# Altium PCB ZigBee土壤传感板.PcbDoc
Units mil, origin at the board's own origin, x right, y up, seen from the top; angles counter-clockwise.
Board outline 3878.5 x 3113.5 mil, 2 copper layers (Top Layer, Bottom Layer); 34 components, 27 nets, 139 pads, 24 vias.
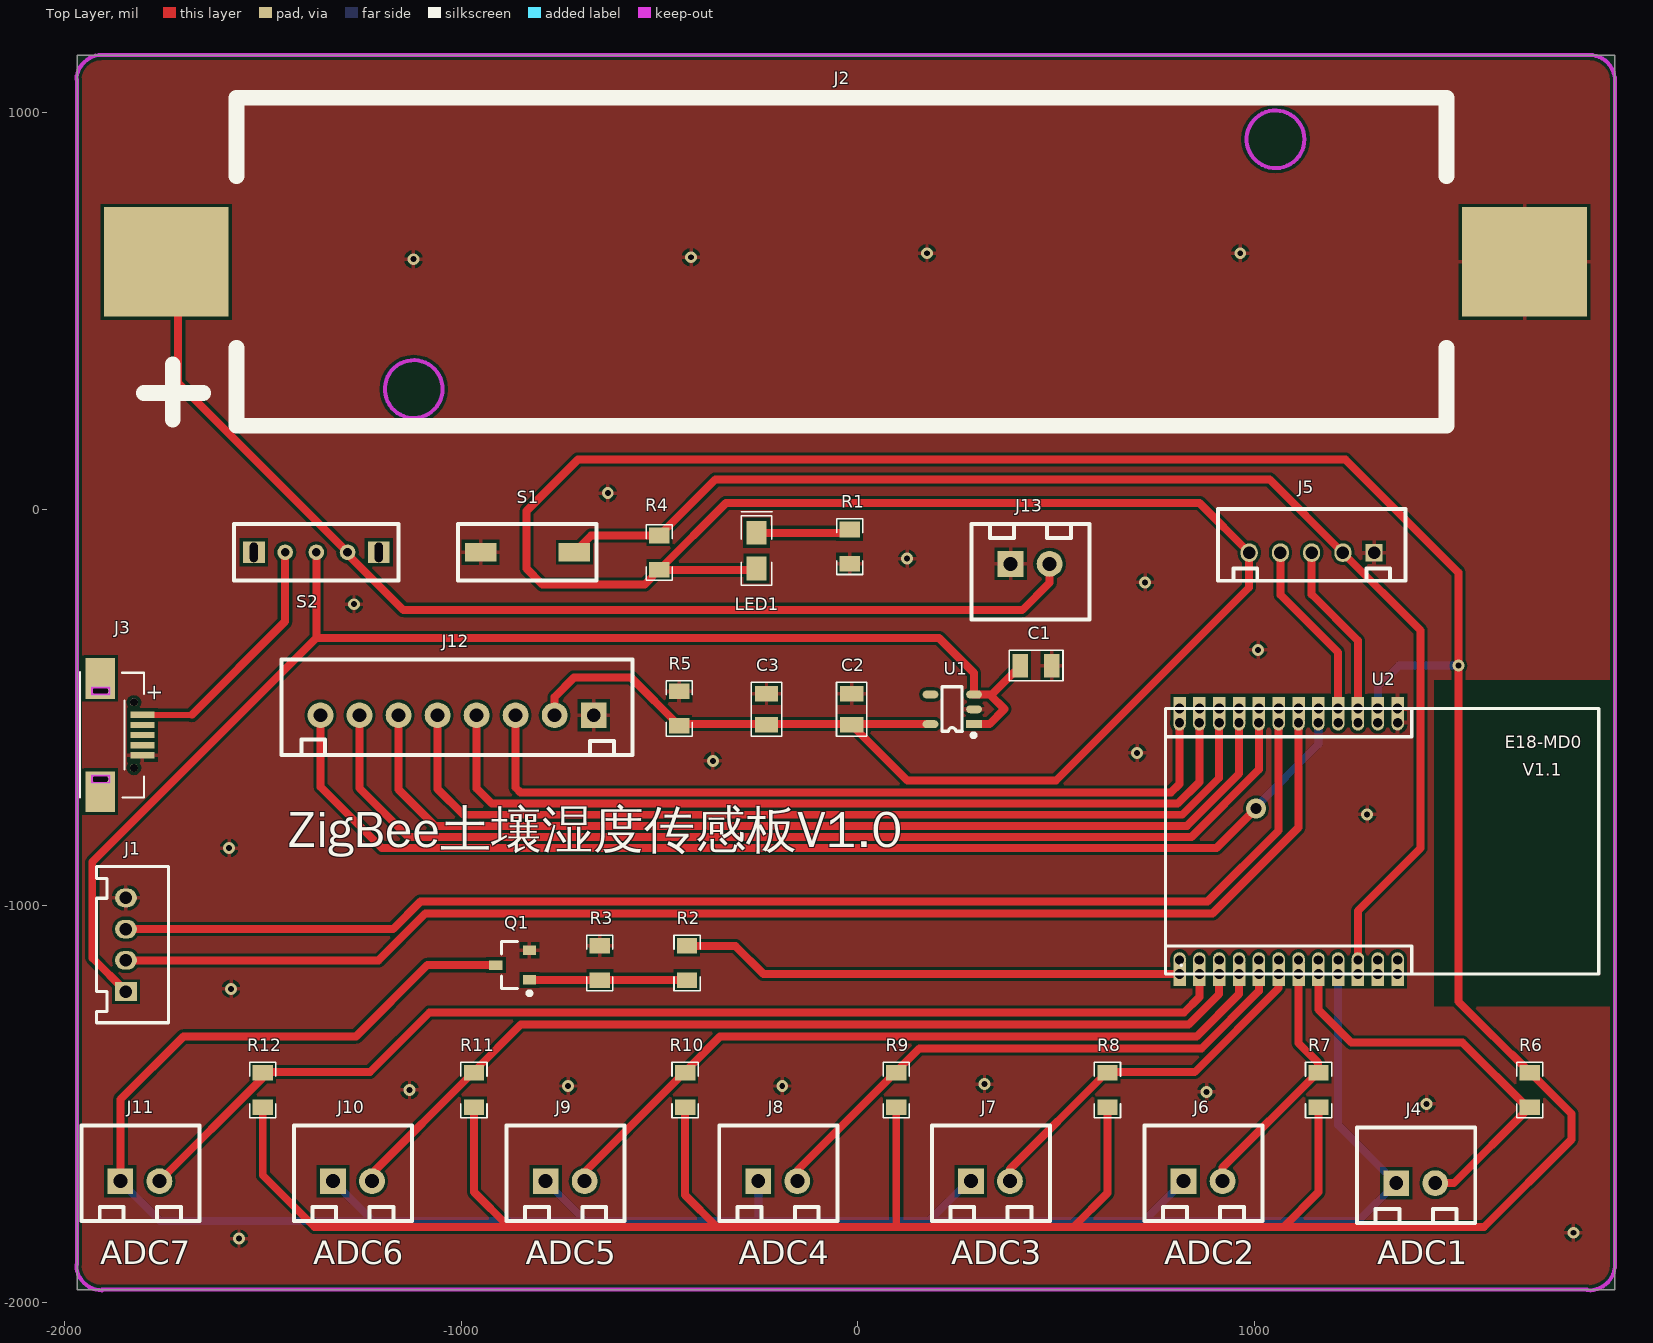
[diagram p0: Top Layer view]
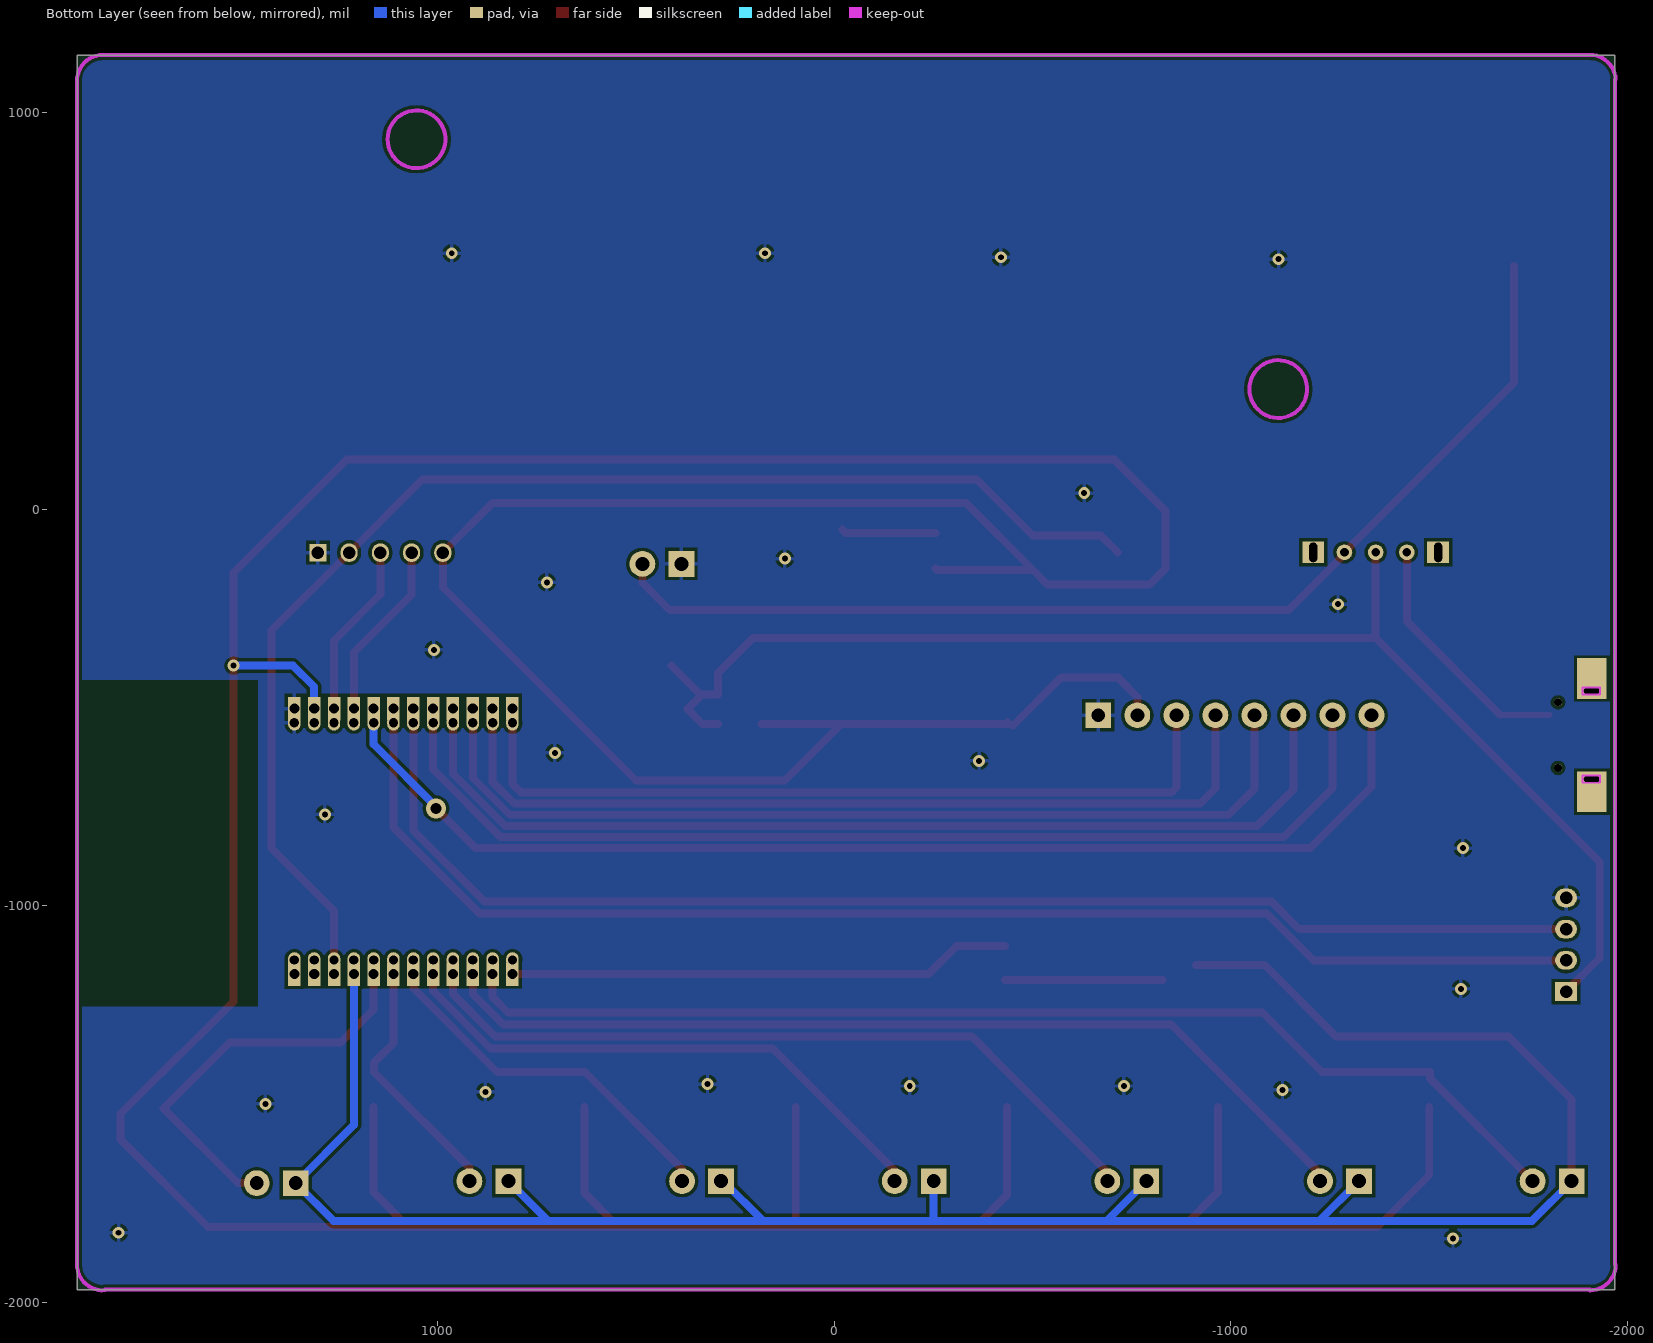
[diagram p1: Bottom Layer view, seen from below]

## Layer stack, top to bottom
Top Layer: signal copper 1.4
Dielectric: dielectric 12.6, FR-4, Dk 4.8
Bottom Layer: signal copper 1.4

## Board outline
-1968.5,-1968.5 -1968.5,1145 1910,1145 1910,-1968.5

## Design rules (kind name [scope] priority, off if disabled: settings)
Clearance [All] p1: gap=8
MinimumSolderMaskSliver [All] p1: minsoldermaskwidth=1
PolygonConnect [All] p1: connectstyle=Relief reliefconductorwidth=10 reliefentries=4 polygonreliefangle="90 Angle"
RoutingVias [All] p1: holewidth=28 width=50 viastyle="Through Hole" minholewidth=28 minwidth=50 maxholewidth=28 maxwidth=50
ShortCircuit [All] p1 off: allowed=FALSE
SilkToSilkClearance [All] p1: silktosilkclearance=8
SilkscreenOverComponentPads [All] p1 off: minsilkscreentomaskgap=5
SolderMaskExpansion [All] p1: expansion=4
Width [All] p1: maxlimit=100 minlimit=5 preferedwidth=10
24 further rules are at their usual default settings.

## Components (designator, comment, footprint, x,y, rotation, side; value= is the part's Value field where it differs from the comment)
C1 "1uF" C0805_M2013 450,-395 r180 top
C2 "10uF" C0805_M2013 -14.81,-505 r90 top
C3 "0.1uF" C0805_M2013 -229.71,-505 r90 top
J1 "PH2.0-4P" PH2.0-4P -1845,-1020 r90 top
J2 "Header 2" 18650 1485,210 r180 top
J3 "micro USB" MICRO-USB -1890,-570 r270 top
J4 "XH-A-2P" XH-A-2P 1407.54,-1700 r0 top
J5 "PH-A-5P" PH-A-5P 1145,-110 r180 top
J6 "XH-A-2P" XH-A-2P 871.28,-1695 r0 top
J7 "XH-A-2P" XH-A-2P 335.03,-1695 r0 top
J8 "XH-A-2P" XH-A-2P -201.23,-1695 r0 top
J9 "XH-A-2P" XH-A-2P -737.49,-1695 r0 top
J10 "XH-A-2P" XH-A-2P -1273.74,-1695 r0 top
J11 "XH-A-2P" XH-A-2P -1810,-1695 r0 top
J12 "PH-A-8P" XH-A-8P -1010,-520 r180 top
J13 "Header 2" XH-A-2P 435,-138.27 r0 top
LED1 "LED-R" 0805_LED -255,-105 r90 top
Q1 "SOT-23" SOT-23-3 -870,-1150 r180 top
R1 "R0805_M2013" R0805_M2013 -20,-95 r270 top
R2 "5.1K" R0805_M2013 -430,-1145 r270 top
R3 "5.1K" R0805_M2013 -650,-1145 r90 top
R4 "R0805_M2013" R0805_M2013 -500,-110 r90 top
R5 "1K" R0805_M2013 -450,-502.91 r270 top
R6 "10K" R0805_M2013 1695,-1465 r270 top
R7 "10K" R0805_M2013 1162.5,-1465 r90 top
R8 "10K" R0805_M2013 630,-1465 r90 top
R9 "10K" R0805_M2013 97.5,-1465 r90 top
R10 "10K" R0805_M2013 -435,-1465 r90 top
R11 "10K" R0805_M2013 -967.5,-1465 r90 top
R12 "10K" R0805_M2013 -1500,-1465 r90 top
S1 "SW-PB" SW-KEY -675,-180 r180 top
S2 "SS12D07" SS-12D07 -1365,-109.13 r180 top
U1 "XC6503D331" SOT23-5 238.74,-505 r180 top
U2 "ZigbeeCC2530Core" CC2530_CORE 1305,-765 r0 top

## Footprints (in the part's own frame and the unit in brackets; to place one, negate y for a bottom-side part, rotate by r counter-clockwise, add the part's x,y. Pads: shape width x height; smd on the part's side, far side on the other; paste and mask are expansions set on the pad)
0805_LED [mil]
  rect 60x50 smd: 1(-45,0) 2(45,0)
  silkscreen extent -88,-39 98,38
18650 [mm] "186"
  rect 8x7 smd: 1(-5,-10.5) 2(82,-10.5)
  Keep-Out Layer circle w0.254: c66.15,-2.35 r1.85
  Keep-Out Layer circle w0.254: c10.95,-18.35 r1.85
  silkscreen extent 0,-21 83.42,0
C0805_M2013 [mm] "Chip Capaci"
  rect 1x1.5 smd: 1(-1,0) 2(1,0)
  silkscreen extent -1.72,-0.97 1.73,0.97
CC2530_CORE [mm]
  oval 0.8x1 hole 0.6: 1(1.445,5.745) 2(0.175,5.745) 3(-1.095,5.745) 4(-2.365,5.745) 5(-3.635,5.745) 6(-4.905,5.745) 7(-6.175,5.745) 8(-7.445,5.745) 9(-8.715,5.745) 10(-9.985,5.745) 11(-11.255,5.745) 12(-12.525,5.745) 13(-12.525,-9.455) 14(-11.255,-9.455) 15(-9.985,-9.455) 16(-8.715,-9.455) 17(-7.445,-9.455) 18(-6.175,-9.455) 19(-4.905,-9.455) 20(-3.635,-9.455) 21(-2.365,-9.455) 22(-1.095,-9.455) 23(0.175,-9.455) 24(1.445,-9.455)
  rect 0.8x1.5 hole 0.65: 1(1.445,6.645) 2(0.175,6.645) 3(-1.095,6.645) 4(-2.365,6.645) 5(-3.635,6.645) 6(-4.905,6.645) 7(-6.175,6.645) 8(-7.445,6.645) 9(-8.715,6.645) 10(-9.985,6.645) 11(-11.255,6.645) 12(-12.525,6.645) 13(-12.525,-10.355) 14(-11.255,-10.355) 15(-9.985,-10.355) 16(-8.715,-10.355) 17(-7.445,-10.355) 18(-6.175,-10.355) 19(-4.905,-10.355) 20(-3.635,-10.355) 21(-2.365,-10.355) 22(-1.095,-10.355) 23(0.175,-10.355) 24(1.445,-10.355)
  Top Layer lines w0.22: -12.409,-9.785 ccw(c-12.409,-9.751) -12.385,-9.775
  silkscreen extent -13.42,-10.35 14.33,6.65
MICRO-USB [mm]
  rect 0.4x1.55 smd: 1(-1.3,2.2) 2(-0.65,2.2) 3(0,2.2) 4(0.65,2.2) 5(1.3,2.2)
  rect 2.6x1.9 hole 0.4 slot 1 at 90 deg copper offset -0.8,0: 6(-2.825,-0.5)
  rect 2.6x1.9 hole 0.4 slot 1 at 90 deg copper offset 0.8,0: 6(2.825,-0.5)
  round 0.5 hole 0.5 unplated: ""(-2.1,1.65) ""(2.1,1.65)
  Keep-Out Layer lines w0.127: 3.054,-1.043 3.054,0.075 2.596,0.075 2.596,-1.043 3.054,-1.043 ; -2.596,-1.043 -2.596,0.075 -3.054,0.075 -3.054,-1.043 -2.596,-1.043
  silkscreen extent -4.05,-1.8 4,2.3
PH2.0-4P [mm]
  rect 1.2x1.4 hole 0.8: 1(-5,0)
  oval 1.2x1.4 hole 0.8: 2(-3,0) 3(-1,0) 4(1,0)
  silkscreen extent -7.01,-2.72 3,1.88
PH-A-5P [mm]
  rect 1.1x1.1 hole 0.8: 1(-4,0)
  oval 1.1x1.2 hole 0.8: 2(-2,0) 3(0,0) 4(2,0) 5(4,0)
  silkscreen extent -6,-2.8 6,1.8
R0805_M2013 [mm]
  rect 1x1.3 smd: 1(-1.1,0) 2(1.1,0)
  silkscreen extent -1.78,-0.84 1.78,0.84
SOT23-5 [mil] "SOT23, 5-Leads, Body 3.1x3.0mm (max), Pitch 0.95mm, IPC Medium De"
  rect 40x20 smd: 1(-55,37.4)
  oval 40x20 smd: 2(-55,0) 3(-55,-37.4) 4(55,-37.4) 5(55,37.4)
  silkscreen extent -59,-57 26,70
SOT-23-3 [mm] "SOT23, 3-Leads, Body 2.9x1.3mm, Pitch 0.95mm, Lea"
  rect 0.85x0.6 smd: 1(-1.075,0.95) 2(-1.075,-0.95) 3(1.075,0)
  silkscreen extent -1.2,-1.5 0.7,1.92, body extent -0.7,-1.5 0.7,1.5, height 1.1
SS-12D07 [mm]
  round 1 hole 0.55: 1(-2,0) 2(0,0) 3(2,0)
  rect 1.4x1.4 hole 0.5 slot 1.25 at 90 deg: ""(-4,0) ""(4,0)
  silkscreen extent -5.28,-1.8 5.28,1.8
SW-KEY [mm] "RE"
  rect 2x1.2 smd: 1(1,-1.8) 2(7,-1.8)
  silkscreen extent -0.43,-3.6 8.45,0
XH-A-2P [mil]
  rect 65x65 hole 35: 1(-49.21,0)
  round 65 hole 35: 2(49.21,0)
  silkscreen extent -148,-100 150,140
XH-A-8P [mil]
  rect 65x65 hole 35: 1(-344.49,0)
  round 65 hole 35: 2(-246.06,0) 3(-147.64,0) 4(-49.21,0) 5(49.21,0) 6(147.64,0) 7(246.06,0) 8(344.49,0)
  silkscreen extent -443,-140 443,100

## Part data
C1 C2 C3: library part Cap, "Capacitor"
J1: library part "Header 4"
J2: "Header, 2-Pin"
Q1: library part NPN, "NPN Bipolar Transistor"
S1: "Switch"
U1: library part XC6503Dxxx

## Via types
v1: diameter 30, hole 15, Top Layer to Bottom Layer, tented both sides, 23 vias
v2: diameter 50, hole 28, Top Layer to Bottom Layer, 1 vias

## Nets (pads, with @x,y where several pads share a name; then routed paths per layer and width w, separated by ;. In a path a pad name is that pad's centre, name@x,y a point inside that pad or via, vN(x,y) a via of type N, cw(c..) or ccw(c..) an arc to the next point about the centre after c; other vN are vias at no path point)
ADC_1: J4.2 R6.2 U2.20 | length 1035.3
  Top Layer w20: U2.20@1161.89,-1172.68 1161.89,-1261.89 1245,-1345 1525,-1345 1691.65,-1511.65 1503.31,-1700 J4.2
ADC_2: J6.2 R7.2 U2.19 | length 642.1
  Top Layer w20: J6.2 920.5,-1660.31 1160.81,-1420 1160.81,-1395.81 1111.89,-1346.89 U2.19@1111.89,-1172.68
ADC_3: J7.2 R8.2 U2.18 | length 932.9
  Top Layer w20: J7.2 384.24,-1664.07 628.31,-1420 850,-1420 1061.89,-1208.11 U2.18@1061.89,-1172.68
ADC_4: J8.2 R9.2 U2.17 | length 1421.4
  Top Layer w20: J8.2 -152.02,-1667.82 155.81,-1360 867.57,-1360 1011.89,-1215.68 U2.17@1011.89,-1172.68
ADC_5: J9.2 R10.2 U2.16 | length 1909.9
  Top Layer w20: J9.2 -688.27,-1671.58 -436.69,-1420 -346.69,-1330 855.15,-1330 961.89,-1223.26 U2.16@961.89,-1172.68
ADC_6: J10.2 R11.2 U2.15 | length 2393.8
  Top Layer w20: J10.2 -1224.53,-1675.34 -969.19,-1420 -849.19,-1300 835,-1300 911.89,-1223.11 U2.15@911.89,-1172.68
ADC_7: J11.2 R12.2 U2.14 | length 2882.3
  Top Layer w20: J11.2 -1501.69,-1435.91 -1501.69,-1420 -1230,-1420 -1080,-1270 822.57,-1270 861.89,-1230.68 U2.14@861.89,-1172.68
CTRL_GND: J4.1 J6.1 J7.1 J8.1 J9.1 J10.1 J11.1 Q1.3 U2.21 | length 5964.9
  Top Layer w20: J11.1 -1859.21,-1489.21 -1700,-1330 -1265,-1330 -1085,-1150 Q1.3 -1025,-1150
  Bottom Layer w20: J11.1 -1759.21,-1795 -1222.96,-1795 ; J10.1 -1222.96,-1795 ; J9.1 -686.7,-1795 ; J8.1 -250.44,-1792.09 -253.35,-1795 ; J7.1 280,-1695 180,-1795 ; J6.1 722.07,-1795 ; U2.21@1211.89,-1172.68 1211.89,-1553.56 J4.1 1263.33,-1795 722.07,-1795 ; -1222.96,-1795 -686.7,-1795 ; -686.7,-1795 -253.35,-1795 ; -253.35,-1795 180,-1795 ; 180,-1795 722.07,-1795
CTRL_PW: R2.1 U2.13 | length 1313
  Top Layer w20: -388.31,-1101.69 R2.1 -308.31,-1101.69 -237.32,-1172.68 U2.13@811.89,-1172.68
EXTERN_1: J12.3 U2.12 | length 2025.4
  Top Layer w20: J12.3 -862.36,-702.64 -850,-715 790,-715 811.89,-693.11 U2.12@811.89,-538.82
EXTERN_2: J12.4 U2.11 | length 2195
  Top Layer w20: J12.4 -960.79,-704.21 -922,-743 807,-743 861.89,-688.11 U2.11@861.89,-538.82
EXTERN_3: J12.5 U2.10 | length 2361.4
  Top Layer w20: J12.5 -1059.21,-705.79 -994,-771 818.6,-771 911.89,-677.71 U2.10@911.89,-538.82
EXTERN_4: J12.6 U2.9 | length 2527.9
  Top Layer w20: J12.6 -1157.64,-707.36 -1066,-799 830.2,-799 961.89,-667.31 U2.9@961.89,-538.82
EXTERN_5: J12.7 U2.8 | length 2691.4
  Top Layer w20: J12.7 -1256.06,-703.94 -1133,-827 841.79,-827 1011.89,-656.9 U2.8@1011.89,-538.82
EXTERN_6: J12.8 U2.5 | length 2933.7
  Top Layer w20: J12.8 -1354.49,-700.51 -1200,-855 905,-855 v2(1005,-755)
  Bottom Layer w15: v2@1000,-755 v2(1005,-755)
  Bottom Layer w20: v2@1000,-755 1161.89,-593.11 U2.5@1161.89,-538.82
GND: C1.1 C2.2 C3.2 J1.4 J2.1 J3.5 J5.1 J12.1 J13.1 Q1.2 R1.2 R3.2 R5.1 S1.2 U1.2 U2.1
  other v1: -1560,-1840 1805,-1825 1435,-1500 880,-1470 -1130,-1465 -730,-1455 -190,-1455 320,-1450 -1580,-1210 -1585,-855 1285,-770 -365,-635 705,-615 1010,-355 -1270,-240 725,-185 125,-125 -630,40 -1120,630 -420,635 175,645 965,645
NetJ2_2: J2.2 J13.2 S2.1 | length 2808.7
  Top Layer w20: J2.2@-1714.25,612.48 -1714.25,318.86 S2.1 -1286.26,-113.8 -1145.06,-255 415,-255 484.21,-185.79 J13.2
NetJ3_1: J3.1 S2.3 | length 631.6
  Top Layer w15: J3.1 -1678.82,-518.82
  Top Layer w20: -1678.82,-518.82 -1443.74,-283.74 S2.3
NetLED1_2: LED1.2 R1.1 | length 238.4
  Top Layer w20: LED1.2 -28.31,-60 R1.1
NetQ1_1: Q1.1 R2.2 R3.1 | length 398.1
  Top Layer w20: Q1.1 -430.91,-1187.4 R2.2
P2.1/DD: J5.4 U2.4 | length 453.7
  Top Layer w20: J5.4 1066.26,-216.26 1211.89,-361.89 U2.4@1211.89,-503.39
P2.2/DC: J5.3 U2.3 | length 441.8
  Top Layer w20: J5.3 1145,-215 1261.89,-331.89 U2.3@1261.89,-503.39
RESET: J5.2 R4.2 S1.1 U2.22 | length 3265
  Top Layer w20: S1.1 -671.93,-66.69 R4.2 -358.31,75 1038.74,75 J5.2 1420,-306.26 1420,-855 1261.89,-1013.11 U2.22@1261.89,-1137.24
UART_RX: J1.2 U2.6 | length 3359.9
  Top Layer w20: J1.2 -1208.11,-1138.11 -1090,-1020 895,-1020 1111.89,-803.11 U2.6@1111.89,-538.82
UART_TX: J1.3 U2.7 | length 3281.8
  Top Layer w20: J1.3 -1171.8,-1059.37 -1102.43,-990 882.57,-990 1061.89,-810.68 U2.7@1061.89,-538.82
VCC-3.3V: C2.1 C3.1 J5.5 J12.2 LED1.1 R4.1 R5.2 R6.1 R7.1 R8.1 R9.1 R10.1 R11.1 R12.1 U1.5 U2.2 | length 14469.8
  Top Layer w10: R5.2 R5.2@-436.18,-532.4
  Top Layer w20: R12.1 -1500,-1680 -1370,-1810 -880,-1810 ; R11.1 -967.5,-1722.5 -880,-1810 ; J12.2 -763.94,-473.94 -715,-425 -571.22,-425 R5.2 ; R5.2@-436.18,-542.4 U1.5 ; R10.1 -435,-1730 -355,-1810 ; LED1.1 -258.31,-153.31 R4.1 ; C2.1 125.82,-685 500,-685 987.52,-197.48 J5.5 862.52,15 -331.69,15 R4.1 ; R9.1 97.5,-1807.5 95,-1810 ; R8.1 630,-1725 545,-1810 ; R7.1 1162.5,-1722.5 1075,-1810 ; 1650,-1375 1800,-1525 1800,-1590 1580,-1810 1075,-1810 ; R6.1 1515,-1241.69 1515,-160 1230,125 -705,125 -835,-5 -835,-150 -795,-190 -536.69,-190 R4.1 ; -880,-1810 -355,-1810 ; -355,-1810 95,-1810 ; 95,-1810 545,-1810 ; 545,-1810 1075,-1810
  Bottom Layer w20: U2.2@1311.89,-503.39 1311.89,-448.11 1365,-395 v1(1515,-395)
VCC-5V: C1.2 J1.1 S2.2 U1.1 U1.3 | length 3457.7
  Top Layer w10: U1.3 296.14,-470 335.9,-470
  Top Layer w20: J1.1 -1930,-1131.85 -1930,-890 -1365,-325 ; S2.2 -1365,-325 ; U1.1 332.6,-542.4 370.45,-504.55 335.9,-470 ; C1.2 338.03,-467.6 U1.3 293.74,-413.74 205,-325 -1365,-325
pads on no net: J3. J3.2 J3.3 J3.4 J3.6 S2. U1.4 U2.23 U2.24

## Polygon pours and split planes (outlines as drawn)
GND on Bottom Layer "Top Layer-No Net" (solid, remove dead copper, pour order 6): -2265,1375 -2220,1330 -2220,-2140 2300,-2140 2330,-2170 2130,-1970 2130,1440
GND on Top Layer "Top Layer-No Net" (solid, remove dead copper, pour order 8): -2100,1270 -2100,-2115 -2070,-2145 -2060,-2155 2330,-2155 2330,1180 2150,1360

## Keep-outs
Keep-Out Layer:
  lines w10: -1970.38,-1905 ccw(c-1905.19,-1905) -1904.99,-1970.19 ; -1970.28,1083.6 cw(c-1905.19,1080) -1905,1145.19 ; -1968.5,-1905 -1968.5,1083.5 ; -1905,-1968.5 1840,-1968.5 ; -1905,1145 1845,1145 ; 1839.89,-1970.01 ccw(c1844.81,-1905) 1910,-1905 1910,1080 ccw(c1844.81,1080) 1845,1145.19

## Other copper
Top Layer:
  pour cut-out: 1452.5,-430 1452.5,-1255 1902.5,-1255 1902.5,-1180 1897.5,-430
Bottom Layer:
  pour cut-out: 1452.5,-430 1452.5,-1255 1902.5,-1255 1902.5,-1180 1897.5,-430

## Silkscreen, mask and mechanical layers (free items; w line width, h text height)
Top Overlay:
  text "ZigBee土壤湿度传感板V1.0" at -1435,-885 h160
  text "ADC7" at -1910,-1905 h60
  text "ADC6" at -1373.33,-1905 h60
  text "ADC5" at -836.67,-1905 h60
  text "ADC4" at -300,-1905 h60
  text "ADC3" at 236.67,-1905 h60
  text "ADC2" at 773.33,-1905 h60
  text "ADC1" at 1310,-1905 h60

## Text inside footprints (layer, text, board x,y; h text height)
J3: Top Overlay "+" at -1789.61,-440.08 h39.37 r270
U2: Top Overlay "E18-MD0" at 1632.36,-602.6 h31.5; Top Overlay "V1.1" at 1676.85,-672.28 h31.5